# EAGLE board can4vscp_eth_rev_A (EAGLE 6.6.0)
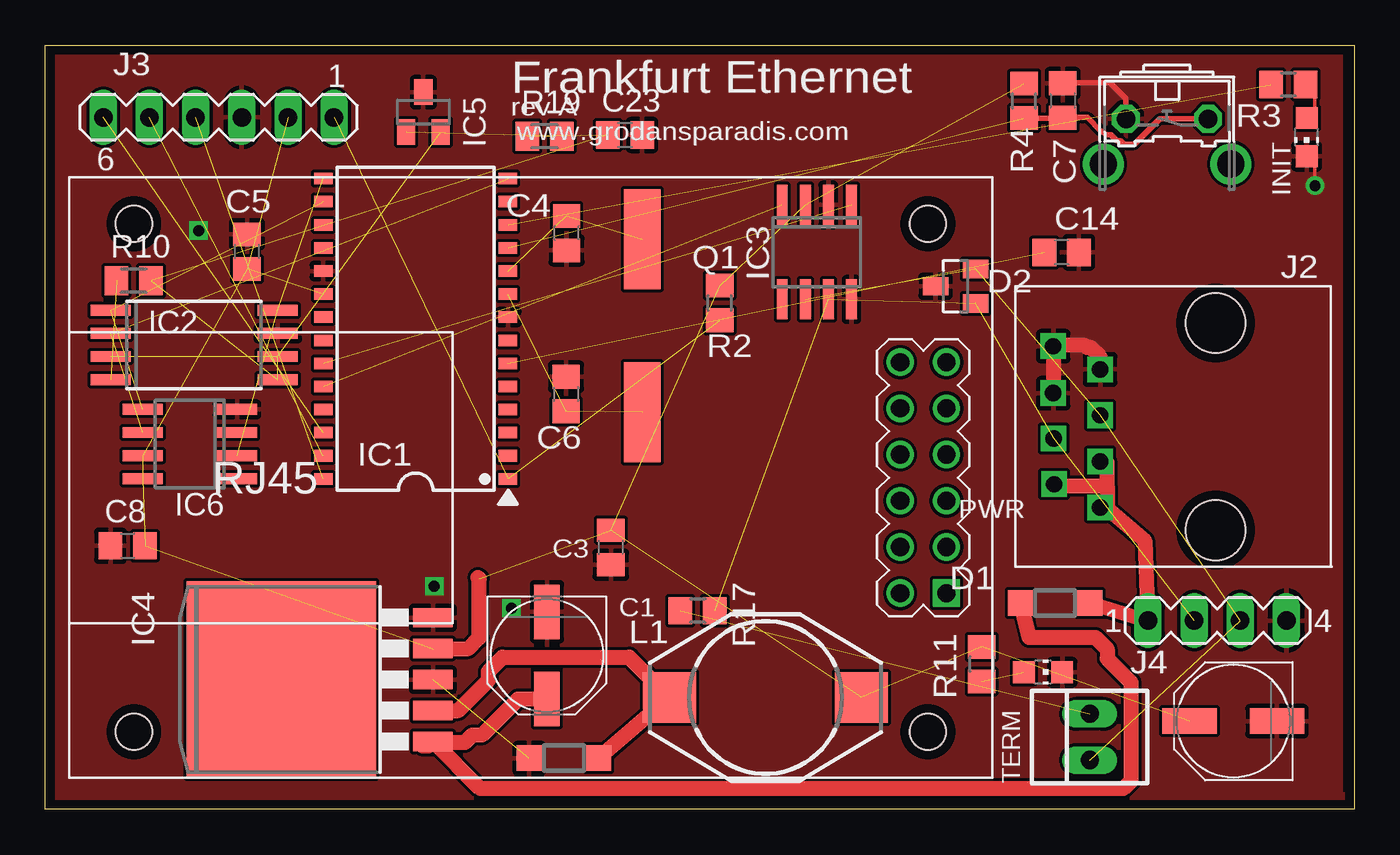
[diagram p0: board, top side]
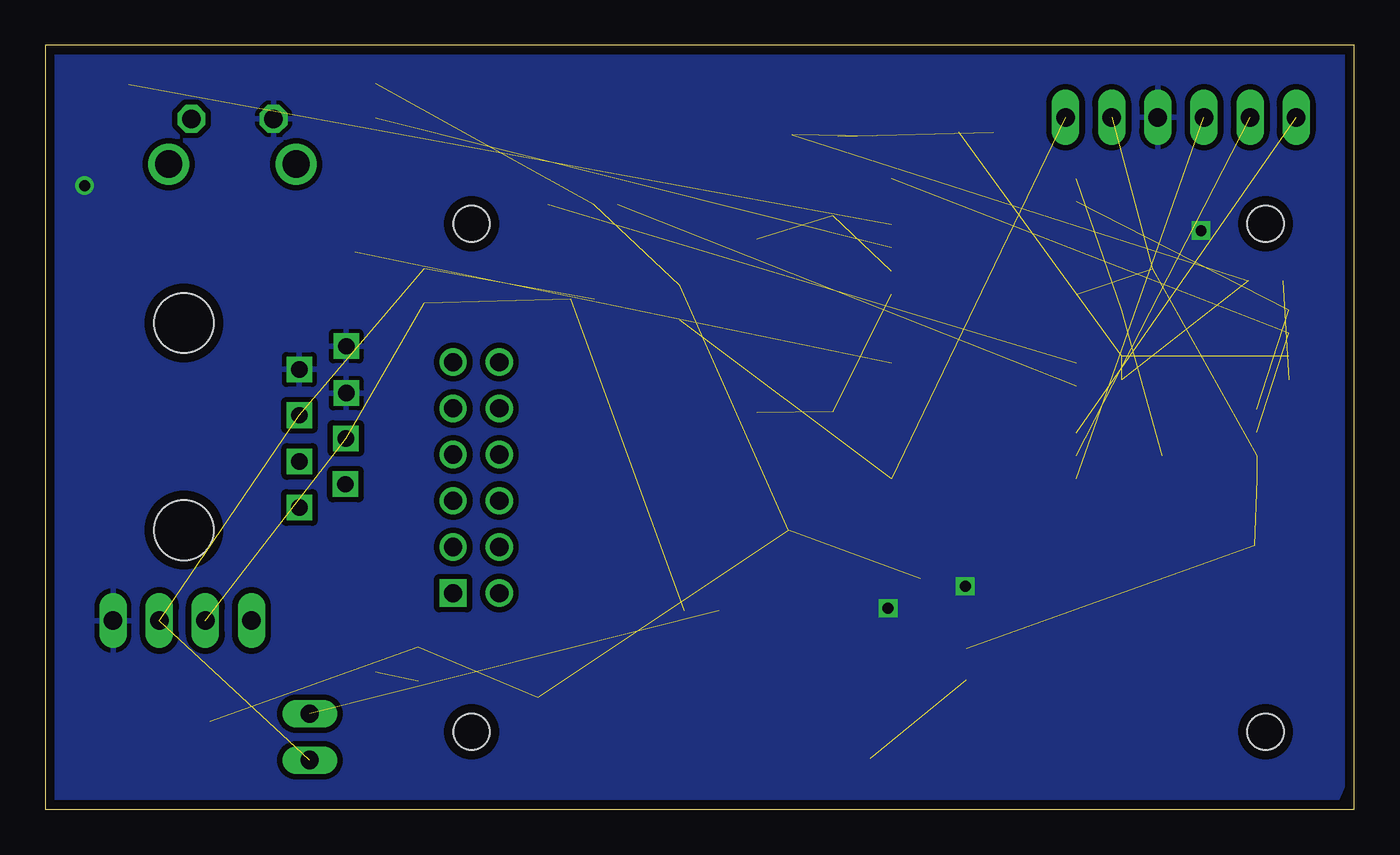
[diagram p1: board, bottom side, seen from below]

Size 72 x 42 mm. Coordinates in mm from the lower left corner, seen from the top.
Outline: 0,0 0,42 72,42 72,0 0,0
Copper layers (1*16): Top 0.0356mm / dielectric 1.5011mm / Bottom 0.0356mm
Design rules "SilverCircuits": minimum track width 7mil, minimum drill 14mil, track to track 7mil, track to pad 7mil, pad to pad 7mil, via to via 7mil, smd to smd 0mil, copper to edge 20mil, drill to drill 8mil, minimum pad ring 10mil, minimum via ring 8mil, stop-mask expansion 4mil, vias tented up to drill 0mil, thermal gap 10mil

## Footprints (pad centres in the part's own frame; a part is rotated, then mirrored left to right if it is on the bottom)
PANASONIC_D = smd 3 x 1.4: + 2.4,0; - -2.4,0
0805 = smd 1.27 x 1.524: 1 -0.953,0; 2 0.953,0
C0805 = smd 1.3 x 1.5: 1 -0.95,0; 2 0.95,0
SOD123 = smd 1.4 x 1.4: A 1.9,0; C -1.9,0
SOT23 = smd 1 x 1.4: 1 -0.95,-1.1; 2 0.95,-1.1; 3 0,1.1
SO28 = smd 0.635 x 1.016: 1 -8.255,-5.08; 2 -6.985,-5.08; 3 -5.715,-5.08; 4 -4.445,-5.08; 5 -3.175,-5.08; 6 -1.905,-5.08; 7 -0.635,-5.08; 8 0.635,-5.08; 9 1.905,-5.08; 10 3.175,-5.08; 11 4.445,-5.08; 12 5.715,-5.08; 13 6.985,-5.08; 14 8.255,-5.08; 15 8.255,5.08; 16 6.985,5.08; 17 5.715,5.08; 18 4.445,5.08; 19 3.175,5.08; 20 1.905,5.08; 21 0.635,5.08; 22 -0.635,5.08; 23 -1.905,5.08; 24 -3.175,5.08; 25 -4.445,5.08; 26 -5.715,5.08; 27 -6.985,5.08; 28 -8.255,5.08
SOP8W = smd 2.2 x 0.6: 1 -4.6,1.905; 2 -4.6,0.635; 3 -4.6,-0.635; 4 -4.6,-1.905; 5 4.6,-1.905; 6 4.6,-0.635; 7 4.6,0.635; 8 4.6,1.905
SO-08 = smd 0.6 x 2.2: 1 -1.905,-2.6; 2 -0.635,-2.6; 3 0.635,-2.6; 4 1.905,-2.6; 5 1.905,2.6; 6 0.635,2.6; 7 -0.635,2.6; 8 -1.905,2.6
TO263-5 = smd 1.067 x 2.159: 1 -3.404,-5.791; 2 -1.702,-5.791; 3 0,-5.791; 4 1.702,-5.791; 5 3.404,-5.791 | smd 10.8 x 10.41: 6 0,2.54
SO-8 = smd 0.6 x 2.2: 1 -1.905,-2.6; 2 -0.635,-2.6; 3 0.635,-2.6; 4 1.905,-2.6; 5 1.905,2.6; 6 0.635,2.6; 7 -0.635,2.6; 8 -1.905,2.6
RJ-45 = drill 0.9 square: 1 -4.45,6.35; 2 -3.17,8.89; 3 -1.92,6.36; 4 -0.65,8.91; 5 0.62,6.35; 6 1.84,8.93; 7 3.14,6.35; 8 4.42,8.93 | hole 3.3: -5.7,0; 5.7,0
MA06-1 = drill 1.016 long: 1 -6.35,0; 2 -3.81,0; 3 -1.27,0; 4 1.27,0; 5 3.81,0; 6 6.35,0
MA04-1 = drill 1.016 long: 1 -3.81,0; 2 -1.27,0; 3 1.27,0; 4 3.81,0
DO3316P = smd 2.92 x 2.79: 1 -5.28,0; 2 5.28,0
CHIP-LED0805 = smd 1.2 x 1.2: A 0,-1.05; C 0,1.05
ETHERNET-ENC28J60 = drill 1 square: 1 22.86,-6.35 | drill 1: 2 20.32,-6.35; 3 22.86,-3.81; 4 20.32,-3.81; 5 22.86,-1.27; 6 20.32,-1.27; 7 22.86,1.27; 8 20.32,1.27; 9 22.86,3.81; 10 20.32,3.81; 11 22.86,6.35; 12 20.32,6.35 | hole 2: -21.844,13.97; 21.844,13.97; -21.844,-13.97; 21.844,-13.97
9C = smd 5.5 x 2: P$1 -4.74,0; P$2 4.76,0
R0805 = smd 1.3 x 1.5: 1 -0.95,0; 2 0.95,0
M0805 = smd 1.3 x 1.6: 1 -0.95,0; 2 0.95,0
B3F-31XX = drill 1.016 octagon: 1 -2.261,-1.245; 2 2.261,-1.245 | drill 1.499 pad 2.159: 3 -3.505,1.245; 4 3.505,1.245
22-23-2021 = drill 1 long: 1 -1.27,0; 2 1.27,0

## Placement (x,y rotation side)
C1  100uF  [PANASONIC_D]  27.59,8.44 270 top
C2  330uF  [PANASONIC_D]  65.36,4.84 180 top
C3  100nF  [0805]  31.11,14.39 90 top
C4  15pF  [C0805]  28.67,31.68 90 top
C5  0.1uF  [C0805]  11.09,30.66 90 top
C6  15pF  [C0805]  28.64,22.83 270 top
C7  0.1uF  [C0805]  55.97,38.97 270 top
C8  0.1uF  [C0805]  4.53,14.49 0 top
C14  1 uF  [C0805]  55.91,30.62 180 top
C23  100n  [C0805]  31.88,37.08 0 top
D1  1N5819  [SOD123]  55.54,11.34 0 top
D2  NUP2105L  [SOT23]  50.07,28.76 90 top
D3  1N5819  [SOD123]  28.52,2.8 180 top
IC1  PIC18F26K80  [SO28]  20.37,26.42 90 top
IC2  AT45DB011D  [SOP8W]  8.18,25.53 0 top
IC3  SN65HVD232  [SO-08]  42.44,30.63 180 top
IC4  LM2575S  [TO263-5]  15.52,7.12 90 top
IC5  11AA02E48  [SOT23]  20.79,38.33 0 top
IC6  MCP23A256  [SO-8]  7.94,20.08 90 top
J2  A00-108-220-450  [RJ-45]  64.38,21.04 90 top
J3  [MA06-1]  9.53,38.05 180 top
J4  [MA04-1]  64.47,10.37 0 top
L1  330 uH  [DO3316P]  39.62,6.14 0 top
LED1  [CHIP-LED0805]  69.39,36.96 180 top
LED2  Power  [CHIP-LED0805]  54.89,7.53 270 top
M1  [ETHERNET-ENC28J60]  26.71,18.23 0 top
Q1  10 MHz  [9C]  32.84,26.59 270 top
R2  10K  [R0805]  37.1,27.84 90 top
R3  1K  [R0805]  68.38,39.85 180 top
R4  10K  [R0805]  53.84,38.95 90 top
R10  100k  [M0805]  4.86,29.06 0 top
R11  1K  [R0805]  51.51,7.97 90 top
R17  120  [R0805]  35.88,10.91 180 top
R19  22K  [M0805]  27.46,37 0 top
S1  [B3F-31XX]  61.71,36.72 180 top
TERM  22-23-2021  [22-23-2021]  57.46,3.97 90 top

## Library data of the parts
C1 C2 C4-C8 C14 C23 R2-R4 R10 R11 R17 R19 = rcl
C3 = cap-master
D1-D3 = diode
IC1 = pic_olin
IC2 IC5 = snow
IC3 = microchip_can
IC4 = v-reg-3
IC6 J2 Q1 = vscpcan
J3 J4 = con-lstb; OC_FARNELL: unknown; OC_NEWARK: unknown
L1 = inductor-coilcraft; OC_FARNELL: unknown; OC_NEWARK: unknown
LED1 LED2 = led
M1 = diy-modules
S1 = switch-omron; MPN: B3F-3100; OC_FARNELL: 959704; OC_NEWARK: 36M3582
TERM = con-molex; MF: MOLEX; MPN: 22-23-2021; OC_FARNELL: 1462926; OC_NEWARK: 25C3832

## Nets
3V3: M1.2
5V: M1.12
+3V3: C23.1 IC2.3 IC2.5 IC2.6 IC5.2 R10.2 R19.1
+12V: D1.A J2.1 J2.2 J2.3 J4.1
AN0: IC1.2
AN1: IC1.3
AN2: IC1.4
AN3: IC1.5
AN4: IC1.7
CANL: D2.2 IC3.6 J2.5 J4.3 TERM.1
EUI48: IC5.1 R19.2
GND: C1.- C2.- C3.1 C4.1 C5.2 C6.1 C7.1 C8.1 C14.1 C23.2 D2.3 D3.A IC1.8 IC1.19 IC2.7 IC3.2 IC3.8 IC4.3 IC4.5 IC5.3 IC6.4 J2.6 J2.7 J2.8 J3.3 J4.4 LED1.C LED2.C S1.2
GND.1: M1.1
GND.2: M1.11
INT0: IC1.21
INT1: IC1.22
IO1: IC1.13
IO2: IC1.25
IO3: IC1.26 J3.6
IO4: IC1.27 J3.5
IO5: IC1.28 J3.4
MISO: IC1.15 IC2.8 IC6.2
MOSI: IC1.16 IC2.1 IC6.5
N$1: D3.C IC4.2 L1.1
N$2: C4.2 IC1.10 Q1.P$1
N$3: C14.2 IC1.6
N$4: IC1.12 R3.2
N$5: LED1.A R3.1
N$6: C7.2 IC1.11 R4.1 S1.1
N$7: C6.2 IC1.9 Q1.P$2
N$11: R17.2 TERM.2
N$20: LED2.A R11.1
N$22: D2.1 IC3.7 J2.4 J4.2 R17.1
RAM_CS: IC6.1
RESET: IC1.1 J3.1 R2.1
ROM_CS: IC2.4 R10.1
RX1: IC1.18
RXCAN: IC1.24 IC3.4
SCK: IC1.14 IC2.2 IC6.6
TX1: IC1.17
TXCAN: IC1.23 IC3.1
VCC: C2.+ C3.2 C5.1 C8.2 IC1.20 IC3.3 IC4.4 IC6.7 IC6.8 J3.2 L1.2 R2.2 R4.2 R11.2
VIN2: C1.+ D1.C IC4.1
VREF: IC3.5

## Tracks (layer width: path | path; a pad name or v marks a point on that pad's centre or on a via)
+3V3  (6 unrouted)
+12V
  Top 0.203: J2.2 55.88,17.78 | 58.42,16.51 J2.1
  Top 0.813: 55.88,17.78 58.42,17.78 | 58.42,17.78 58.42,19.05 J2.3 | 58.42,17.78 58.42,16.51 60.48,14.76 J4.1 D1.A
CANL  (4 unrouted)
EUI48  (1 unrouted)
GND  (via drill 0.6)  (1 unrouted)
  Top 0.203: v69.85,34.29 69.85,35.56 LED1.C
  Top 0.305: S1.2 59.45,39.06 58.55,39.96 56.01,39.96 C7.1
  Top 0.813: J2.7 58.03,24.87 57.5,25.4 57.3,25.4 57.2,25.5 55.49,25.5 J2.8 J2.6
  other vias: 8.42,31.82 25.64,11.05 21.39,12.26
  pour Bottom (isolate 0.305): 0.5,1.58 1.18,0.08 71.56,0.31 71.48,1.13 71.5,34.3 71.42,41.86 0.33,41.86 0.51,33.68
  pour Top: 0.57,41.92 0.56,41.52 0.56,0.32 71.6,0.32 71.6,0.81 71.28,0.81 71.28,41.6 2.5,41.9 2.1,41.85
IO3  (1 unrouted)
IO4  (1 unrouted)
IO5  (1 unrouted)
MISO  (2 unrouted)
MOSI  (2 unrouted)
N$1
  Top 0.813: D3.C L1.1 32.12,8.36 25.15,8.36 24.37,7.58 24.37,7.08 22.71,5.42 IC4.2
N$2  (2 unrouted)
N$3  (1 unrouted)
N$4  (1 unrouted)
N$5
  Top 0.203: 69.85,39.37 69.85,38.1 LED1.A
  Top 0.254: 69.85,39.37 R3.1
N$6  (1 unrouted)
  Top 0.305: R4.1 55.95,38 C7.2 55.99,38.04 57.32,38.04 58.07,37.29 58.13,37.29 58.33,37.09 58.62,37.09 58.95,36.76 59.14,36.76 59.33,36.57 59.92,36.57 61.31,37.97 S1.1
N$7  (2 unrouted)
N$11  (1 unrouted)
N$20  (1 unrouted)
N$22  (4 unrouted)
RESET  (2 unrouted)
ROM_CS  (1 unrouted)
RXCAN  (1 unrouted)
SCK  (2 unrouted)
TXCAN  (1 unrouted)
VCC  (13 unrouted)
  Top 0.813: IC4.4 23.27,8.82 23.87,9.42 23.87,12.68 23.8,12.75
VIN2
  Top 0.813: D1.C 54.11,9.45 57.77,9.45 58.42,8.8 58.42,8.27 59.72,6.97 59.72,1.54 59.3,1.12 23.91,1.12 IC4.1 21.08,3.48 20.77,3.48 20.95,3.66 23.07,3.66 23.48,4.07 24.02,4.07 25.99,6.04 C1.+

## Text on the board
tNames: Frankfurt Ethernet | rev A | www.grodansparadis.com | INIT | PWR